# Altium PCB FIT_PM_Dual_Range_AFE.PcbDoc (part 12 of 17)
Units mm, origin at the board's own origin, x right, y up, seen from the top; angles counter-clockwise.
Board outline 259 x 114 mm, 8 copper layers (Top Layer, Mid-Layer 1, Mid-Layer 2, Layer 1, Layer 2, Mid-Layer 3, Mid-Layer 4, Bottom Layer), stack 1.616 mm thick; 963 components, 806 nets, 4757 pads, 2208 vias.
Unrouted connection lines stored in the file: 682.
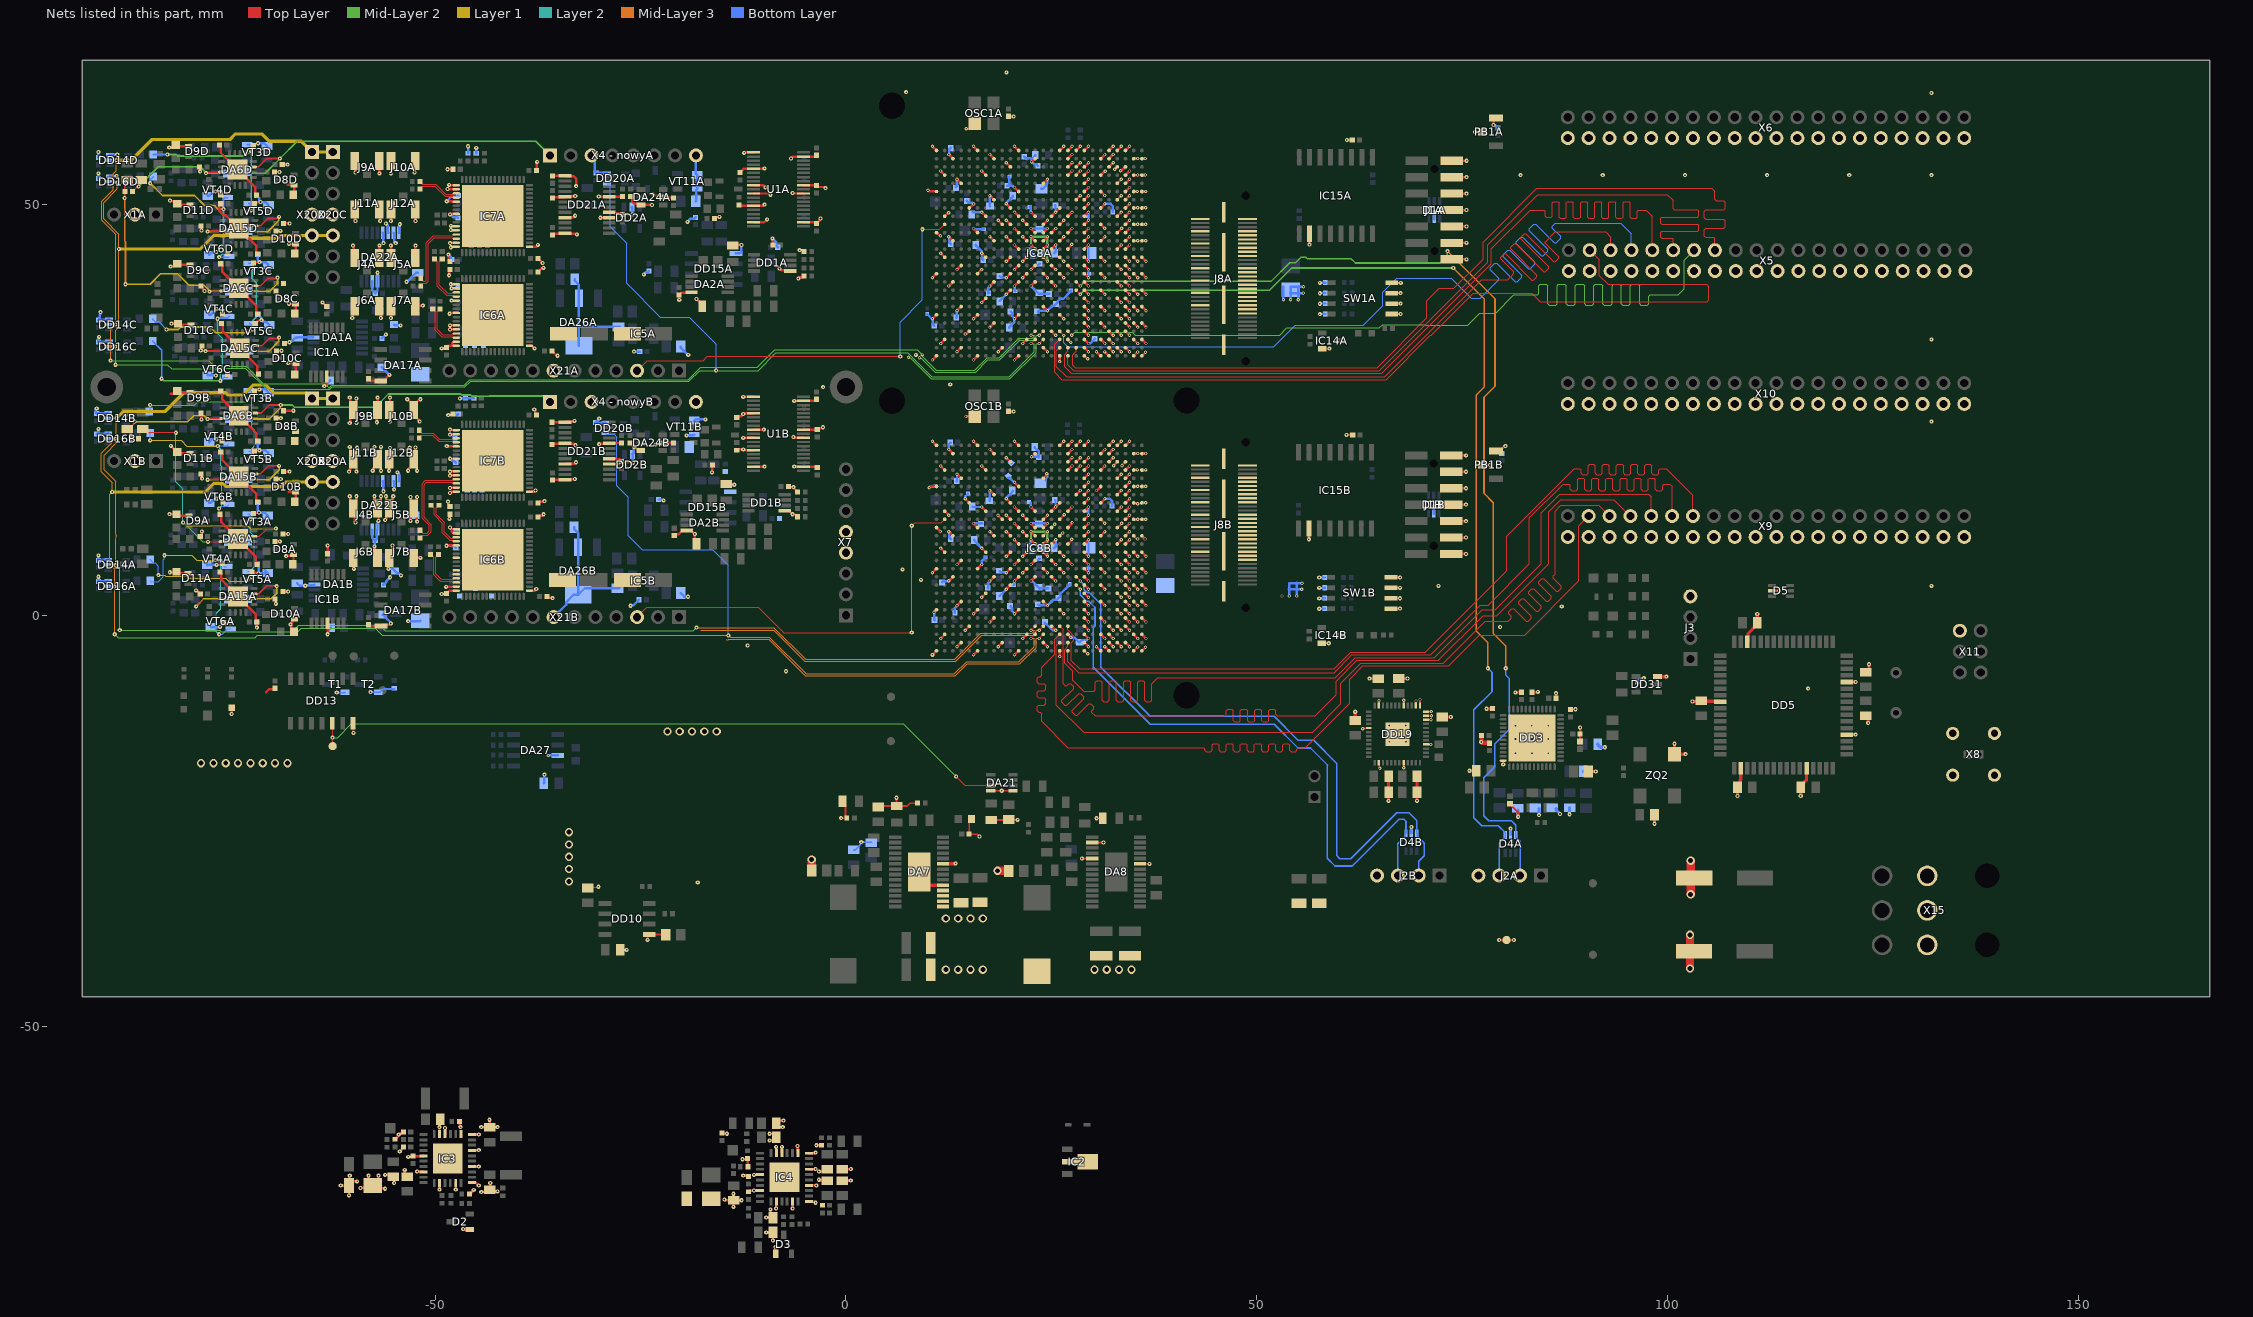
[diagram p14: the nets of this part, all layers, seen from the top]

## Via types
v1: diameter 0.5, hole 0.2, Top Layer to Bottom Layer, tented both sides, 1234 vias
v2: diameter 0.4, hole 0.2, Top Layer to Bottom Layer, tented both sides, 876 vias
v3: diameter 1, hole 0.6, Top Layer to Bottom Layer, tented both sides, 74 vias
v4: diameter 0.8, hole 0.4, Top Layer to Bottom Layer, tented both sides, 15 vias
v5: diameter 0.5, hole 0.2, Top Layer to Bottom Layer, 9 vias

## Nets (pads, with @x,y where several pads share a name; then routed paths per layer and width w, separated by ;. In a path a pad name is that pad's centre, name@x,y a point inside that pad or via, vN(x,y) a via of type N, cw(c..) or ccw(c..) an arc to the next point about the centre after c; other vN are vias at no path point) (continued)
GND: (continued)
  Bottom Layer w0.3: v1(-91.2,25.2) -91.3,25.1 -91.3,24.65 C125B.1@-91.2,24.55 -91.15,24.6 -89.85,24.6 DD14B.3@-89.8,24.65 ; v1(-91,4.7) C294A.1@-91,4.1 -90.95,4.15 -89.85,4.15 DD16A.3@-89.8,4.2 ; v1(-91,7.3) C125A.1@-91,6.7 -90.95,6.75 -89.85,6.75 DD14A.3@-89.8,6.8 ; v1(-91,22.7) -91.04,22.66 -91.04,22.21 C294B.1@-91.2,22.05 -91.15,22.1 -89.85,22.1 DD16B.3@-89.8,22.15 ; C125D.1@-91,53.15 v1(-91,53.8) ; C294D.1@-91,55.75 v1(-91,56.4) ; v1(-90.9,33.9) -91,33.8 C125C.1@-91,33.25 -90.95,33.3 -89.75,33.3 DD16C.3@-89.7,33.35 ; v1(-90.74,36.902) -90.779,36.863 -90.779,36.621 -90.84,36.56 -90.84,36.11 C294C.1@-91,35.95 -90.95,36 -89.75,36 DD14C.3@-89.7,36.05 ; DD16D.3@-89.6,53.45 -89.575,53.475 -88.795,53.475 v1(-88.77,53.5) ; DD14D.3@-89.6,56.05 -88.75,56.05 v1(-88.7,56.1) ; VT4A.1@-77.75,6.125 -77.725,6.15 v1(-76.602,6.15) ; VT6C.1@-77.7,29.2 v1(-76.7,29.2) ; VT4D.1@-77.668,51.046 -77.518,51.046 -77.021,51.543 -76.809,51.543 v1(-76.77,51.582) ; VT6B.1@-77.5,13.679 -77.35,13.679 -76.87,14.159 -76.639,14.159 v1(-76.601,14.197) ; VT4B.1@-77.5,21.079 -77.15,21.429 v1(-76.6,21.429) ; VT4C.1@-77.5,36.579 -77.35,36.579 -76.625,37.304 v1(-76.6,37.304) ; VT6D.1@-77.5,43.879 -77.15,44.229 v1(-76.6,44.229) ; VT6A.1@-77.3,-1.45 -77.284,-1.434 -76.234,-1.434 v1(-76.2,-1.4) ; C138D.1@-71.768,51.096 -71.4,50.729 -71.4,50.491 -71.26,50.351 v1(-71.26,50.308) ; C140A.1@-71.75,-0.8 -71.75,-1.45 v1(-71.7,-1.5) ; C138A.1@-71.65,6.225 -71.5,6.075 v1(-71.5,5.1) VT5A.1@-70.75,5.1 ; C140B.1@-71.6,13.729 -71.6,12.729 -71.45,12.579 v1(-71.45,12.525) -71.425,12.5 -70.75,12.5 VT3A.1@-70.4,12.15 ; C138B.1@-71.6,21.129 -71.6,20.354 -71.4,20.154 v1(-71.4,20.1) -70.65,20.1 VT5B.1@-70.3,19.75 ; C138C.1@-71.6,36.629 -71.19,36.219 -71.19,35.967 v1(-71.152,35.929) -71.098,35.929 -70.897,35.729 VT5C.1@-70.75,35.729 ; C140D.1@-71.6,43.929 -71.6,43.254 -71.4,43.054 v1(-71.4,43) -70.65,43 VT3C.1@-70.3,42.65 ; v1(-71.568,57.468) -70.818,57.468 VT3D.1@-70.468,57.118 ; v1(-71.4,27.5) -70.65,27.5 VT3B.1@-70.3,27.15 ; v1@-71.266,50.308 -71.257,50.3 -70.65,50.3 VT5D.1@-70.3,49.95 ; VT5A.1@-70.75,5.5 VT5A.1@-70.4,5.15 ; VT5C.1@-70.55,35.7 VT5C.1@-70.2,35.35 ; v1(-67.734,33.236) -67.695,33.275 -67.55,33.275 -67.025,33.8 R122xA.1@-66.8,33.8 -66.776,33.824 DA1A.11@-64.819,33.824 ; R122xB.1@-66.8,3.9 -66.5,3.6 v1(-65.817,3.6) ; v1@-65.817,3.613 -65.779,3.651 -65.65,3.651 -65.62,3.681 -64.788,3.681 DA1B.11@-64.713,3.756 ; v1(-63.5,27.9) -63.15,28.25 -63.125,28.25 -62.8,28.575 C319A.1@-62.8,28.6 ; v1(-63.1,-2.3) -63.1,-2.246 -63.025,-2.171 -63.025,-1.825 C320B.1@-62.7,-1.5 ; DA22B.6@-57.675,10.45 -57.657,10.432 -57.657,9.457 -57.382,9.182 -57.218,9.182 -57.14,9.26 -57.14,9.374 -57.09,9.424 -57.09,10.385 DA22B.5@-57.025,10.45 -57.025,11.375 v1(-56.9,11.5) ; DA22A.6@-57.675,40.65 -57.675,39.575 C90A.1@-57.3,39.2 -57.025,39.475 DA22A.5@-57.025,40.65 -57.025,41.675 v1(-57,41.7) ; v1(-57.4,8.4) -57.362,8.438 -57.362,9.038 C90B.1@-57.3,9.1 ; C320A.1@-56.5,30.2 -56.475,30.2 -56.15,29.875 -56.15,29.85 -55.576,29.276 v1(-55.572,29.276) ; C313A.1@-56.5,33.7 v1(-56,34.2) ; C319B.1@-56.4,0.1 -56.375,0.1 -56.05,-0.225 -56.05,-0.25 -55.4,-0.9 v1(-55.4,-1) ; DA22B.13@-56.375,16.35 -56.3,16.275 v1(-56.3,15.1) ; DA22A.13@-56.375,46.55 -56.3,46.475 v1(-56.3,45.3) ; C313B.1@-56.3,3.7 -55.948,4.052 -55.948,4.171 v1(-55.485,4.634) ; v1(-56,47.7) -55.8,47.5 -55.8,46.625 DA22A.14@-55.725,46.55 ; v1(-55.7,5.65) -55.15,5.65 R248B.1@-54.9,5.4 -54.6,5.1 -54.408,5.1 -54.17,4.862 v1(-54.166,4.862) ; DA22B.15@-55.075,16.35 -55,16.275 v1(-55,15.3) ; DA22A.15@-55.075,46.55 -55,46.475 -55,45.5 v1(-54.8,45.3) ; R248A.1@-55,35.4 -54.926,35.326 -54.226,35.326 v1(-54.2,35.3) ; v1(-54.6,17.4) -54.4,17.2 -54.4,16.375 DA22B.16@-54.425,16.35 ; DA22A.16@-54.425,46.55 -54.35,46.625 -54.35,47.55 v1(-54.3,47.6) ; v1(-53.5,40.6) -53.462,40.638 -53.387,40.638 -52.325,41.7 R46A.1@-52.1,41.7 ; v1(-53.3,-0.7) -51.85,-0.7 C103B.2@-51.8,-0.65 ; v1(-48.626,8.47) -48.59,8.506 -48.021,8.506 -47.925,8.41 -47.66,8.41 C3B.1@-47.5,8.25 ; v1(-48.6,50.4) -48.055,50.945 -47.336,50.945 C55A.1@-47.176,51.105 ; v1(-48.445,13.842) -48.445,13.788 -48.376,13.72 -48.376,13.425 C59B.1@-48.216,13.265 ; v1(-48.413,24.368) -48.375,24.407 -47.293,24.407 C58B.1@-47.2,24.5 ; v1(-48.4,43.9) -48.129,43.629 -48.129,43.456 C58A.1@-47.969,43.296 ; v1(-48.2,10.7) -47.766,10.266 -47.387,10.266 -47.247,10.126 R26B.1@-47.247,10.106 ; v1(-48.2,22) -48.162,21.962 -47.962,21.962 C55B.1@-47.6,21.6 ; v1(-48.19,48.8) -48.136,48.8 -47.863,48.527 -47.386,48.527 C50A.1@-47.226,48.367 ; v1(-48.175,19.056) -47.879,18.76 -47.66,18.76 C50B.1@-47.5,18.6 ; v1(-47.993,39.8) -47.955,39.838 -47.315,39.838 R26A.1@-47.247,39.906 ; v1(-47,26.4) -46.34,26.4 R30B.1@-46.3,26.44 R24B.1@-45.3,26.44 ; R30A.1@-46,56.24 v1(-46,57.1) ; R24A.1@-45,56.24 v1(-45,56.9) ; C255.1@-36.781,-20.414 -36.7,-20.333 v1(-36.7,-19.383) ; v2(-36.253,-17.049) DA27.7@-35.069,-17.049 ; X21B.7@-35.58,-0.22 -34.075,1.285 -34.075,1.575 -33.15,2.5 DA26B.4@-32.6,2.5 ; C144B.1@-33.1,10.7 -33.1,10.525 -32.6,10.025 DA26B.2@-32.6,8.3 DA26B.4@-32.6,2.5 ; C144A.1@-33,40.9 -33,40.725 -32.5,40.225 DA26A.2@-32.5,38.6 -32.5,35.02 ; DA26A.4@-32.5,32.8 -32.5,35.02 ; -30.96,55.98 -30.96,55.601 -30.56,55.201 -30.56,54.01 C94A.1@-30.4,53.85 DD20A.3@-29.1,53.85 ; v1(-30.028,23.95) -30.225,23.754 -30.225,23.725 C94B.1@-30.5,23.45 DD20B.3@-29.3,23.45 ; C67B.1@-27.8,3.3 -31.8,3.3 DA26B.4@-32.6,2.5 ; C67A.1@-27.7,35.1 -32.42,35.1 -32.5,35.02 ; C67B.1@-27.65,3.3 -27.225,3.725 -27.225,3.875 -26.9,4.2 IC5B.2@-26,4.2 ; C67A.1@-27.55,35.1 -27.125,34.675 -27.125,34.525 -26.9,34.3 IC5A.2@-26,34.3 ; v1(-26.215,1.168) -26.176,1.206 -25.894,1.206 C56B.1@-25.2,1.9 ; DD2A.2@-26.05,49.7 -26.025,49.675 -26.025,48.825 v1(-26,48.8) ; v1(-25.925,18.577) -25.963,18.614 -25.963,19.563 DD2B.2@-26,19.6 -25.856,19.744 -25.856,20.47 v1(-25.818,20.509) ; v1(-25.8,32.1) C56A.1@-25.1,32.1 ; v1(-24.6,41.5) -24.36,41.74 -24.16,41.74 C101A.1@-24,41.9 ; C101B.1@-22.8,14.1 -22.3,14.1 v1(-22.2,14) ; C62B.1@-20.1,2.7 -20.1,2.686 -19.675,2.261 v1(-19.228,2.261) ; C62A.1@-20.1,32.7 -20.1,32.55 -19.25,31.7 v1(-19.2,31.7) ; v1(-19.4,21.9) -18.55,21.9 VT11B.2@-18.45,22 ; v1(-19.3,47.9) -18.91,48.29 -18.46,48.29 C117A.1@-18.3,48.45 ; VT11B.1@-18.45,23.7 -18.293,23.857 v1(-17.115,23.857) ; C79A.1@-18.3,50.4 -18.25,50.45 -18.25,51.75 VT11A.2@-18.1,51.9 VT11A.1@-18.1,53.6 -18.26,53.76 -18.26,55.98 ; DD15A.5@-13.4,44.07 -12.925,44.07 -12.775,44.22 -12.775,44.97 -12.713,45.032 v1(-12.713,45.086) ; v1(-8.961,45.886) -8.46,45.385 -8.46,44.96 C113A.1@-8.3,44.8 ; C196A.1@9.904,36.671 9.904,36.646 10.445,36.105 10.5,36.105 v2(10.519,36.086) 10.519,36.059 10.581,35.997 10.581,35.401 C232A.1@10.756,35.226 ; v2(10.116,15.528) 10.143,15.528 10.332,15.717 C98B.1@10.903,15.717 ; v2(10.719,0.385) 10.738,0.366 10.738,-0.547 C165B.1@10.779,-0.589 ; C225B.1@11.699,4.007 11.867,4.174 12.5,4.174 v2(12.519,4.194) ; v2(12.519,10.186) 12.519,10.159 12.586,10.092 12.586,9.449 C166B.1@12.752,9.282 ; v2(12.519,20.186) 12.519,20.822 12.693,20.996 C231B.1@12.757,20.996 ; v2(12.519,46.086) 12.519,46.059 12.582,45.996 12.582,45.363 C225A.1@12.759,45.186 ; v2(12.519,56.086) 12.557,56.124 12.557,56.696 C231A.1@12.757,56.895 ; C232B.1@13.269,0.296 13.255,0.31 13.255,0.895 13.519,1.159 v2(13.519,1.186) ; C166A.1@13.419,36.246 13.5,36.327 13.5,37.067 v2(13.519,37.086) ; C228B.1@13.479,16.336 13.513,16.37 13.513,17.18 v2(13.519,17.186) ; v2(14.519,14.186) 14.538,14.205 14.538,14.494 14.85,14.806 C196B.1@14.85,14.831 ; C167A.1@14.7,50.442 14.905,50.237 15.35,50.237 15.511,50.077 v2(15.538,50.077) ; C222B.1@15.421,13.195 15.43,13.186 v2(16.519,13.186) ; C222A.1@15.421,49.095 15.43,49.086 v2(16.519,49.086) ; v2(15.519,47.086) 15.546,47.086 15.635,46.997 C98A.1@16.77,46.997 ; v2@15.526,11.193 16.578,11.193 C167B.1@16.585,11.186 ; C230B.1@15.607,9.187 15.607,9.112 16.519,8.2 v2(16.519,8.186) ; C230A.1@15.819,45.086 15.819,45.011 16.5,44.33 16.5,44.105 v2(16.519,44.086) 16.519,44.059 16.56,44.018 16.56,43.391 C165A.1@16.712,43.239 ; v2(16.519,6.186) 16.538,6.205 16.538,6.629 16.975,7.066 C193B.1@17,7.066 ; C229B.1@17.27,3.347 C229B.1@17.337,3.414 ; C229B.1@17.345,3.311 17.345,3.958 17.519,4.132 v2(17.519,4.186) ; C229A.1@17.412,39.278 C229A.1@17.345,39.211 17.345,39.858 17.519,40.032 v2(17.519,40.086) ; v2(17.519,15.186) 17.519,13.925 C164B.1@17.522,13.922 ; v2(17.519,51.086) 17.519,49.825 C164A.1@17.522,49.822 ; C157B.1@18.704,5.388 18.868,5.224 19.481,5.224 v2(19.519,5.186) ; C157A.1@18.704,41.288 18.868,41.124 19.481,41.124 v2(19.519,41.086) ; C197B.1@18.719,2.382 19.519,3.182 v2(19.519,3.186) v2@19.5,3.186 ; C197A.1@18.719,38.282 19.519,39.082 v2(19.519,39.086) v2@19.5,39.086 ; v2(19.519,14.186) 19.557,14.224 19.557,14.341 20.319,15.103 C227B.1@20.319,15.178 ; v2(19.519,19.186) C221B.1@20.194,18.511 ; v2(19.519,50.086) 19.557,50.124 19.557,50.241 20.319,51.003 C227A.1@20.319,51.078 ; C226A.1@19.601,52.27 19.926,52.27 ; C226B.1@19.769,16.732 19.918,16.732 20.446,16.205 20.5,16.205 v2(20.519,16.186) ; C193A.1@19.889,53.394 19.889,52.306 19.926,52.27 ; C208A.1@19.892,35.022 19.892,35.097 20.5,35.705 20.5,36.067 v2(20.519,36.086) 20.519,36.14 20.245,36.414 20.245,36.779 C216A.1@20.04,36.984 ; C216B.1@20.04,1.084 20.245,0.879 20.245,0.514 20.519,0.24 v2(20.519,0.186) v2@20.519,0.132 ; C160B.1@20.446,3.693 20.5,3.747 20.5,4.167 v2(20.519,4.186) ; v2(20.519,40.086) 20.557,40.048 20.557,39.484 C160A.1@20.603,39.439 ; v2(20.519,52.086) 20.465,52.086 20.281,52.27 19.926,52.27 ; C221A.1@21.68,55.831 21.855,55.656 22.455,55.656 22.589,55.522 ; C159A.1@22.369,49.71 22.394,49.71 C159A.1@22.469,49.785 ; C159B.1@22.481,13.737 22.481,13.251 22.519,13.213 v2(22.519,13.186) ; C159A.1@22.481,49.71 22.481,49.124 v2(22.519,49.086) ; v2(22.519,4.186) 22.557,4.148 22.682,4.148 C80B.1@23.554,3.276 ; v2(22.519,6.186) 23.034,6.701 23.368,6.701 C147B.1@23.573,6.906 ; v2(22.519,11.186) v2(24.519,11.186) ; v2(22.519,40.086) 23.466,39.139 C152A.1@24.726,39.139 ; v2(22.519,42.086) 23.034,42.601 23.368,42.601 C147A.1@23.573,42.806 ; v2(22.519,47.086) v2(24.519,47.086) ; v2(22.589,19.292) 22.616,19.292 22.639,19.316 C214B.1@23.47,19.316 ; C215B.1@22.984,20.481 22.984,20.406 23.234,20.156 23.294,20.156 23.47,19.98 C214B.1@23.47,19.316 ; C215A.1@23.037,56.023 23.037,55.948 22.787,55.698 22.764,55.698 22.589,55.522 ; C200A.1@23.371,54.709 23.196,54.884 22.925,54.884 22.636,55.173 22.608,55.173 v2(22.589,55.192) 22.589,55.522 ; C198A.1@23.388,36.846 23.388,37.004 23.433,37.05 24.456,37.05 24.492,37.086 v2(24.519,37.086) 25.107,37.673 25.346,37.673 25.551,37.878 C211A.1@25.551,37.883 25.756,38.088 25.756,38.237 26.049,38.529 26.44,38.529 27.319,39.408 27.319,39.457 C162A.1@27.394,39.532 ; C200B.1@23.404,1.315 23.508,1.211 24.494,1.211 v2(24.519,1.186) 25.209,1.876 25.654,1.876 25.859,2.081 C211B.1@25.859,2.086 26.064,2.291 26.064,2.568 27.25,3.754 C162B.1@27.25,3.779 ; C214B.1@23.47,19.266 C214B.1@23.47,19.316 ; C80B.1@23.516,3.276 C80B.1@23.554,3.276 ; C214B.1@23.539,19.316 C214B.1@23.47,19.316 ; C80B.1@23.591,3.239 C80B.1@23.554,3.276 ; C84A.1@23.796,51.91 23.946,51.91 24.371,52.335 24.371,52.485 24.481,52.595 24.481,53.048 v2(24.519,53.086) ; C198B.1@24.186,-0.891 24.186,-0.896 24.391,-1.101 24.444,-1.101 25.157,-1.814 v2(25.519,-1.814) ; C84B.1@24.296,16.472 24.296,16.622 24.481,16.807 24.481,17.197 24.453,17.224 v2(24.453,17.252) ; C152B.1@24.651,3.276 C80B.1@23.554,3.276 ; L8B.2@25.356,8.179 25.519,8.342 v2(25.519,9.186) ; L8A.2@25.356,44.079 25.519,44.242 v2(25.519,45.086) ; C85B.1@25.49,13.995 25.504,13.981 25.504,13.201 v2(25.519,13.186) ; C85A.1@25.49,49.895 25.504,49.881 25.504,49.101 v2(25.519,49.086) ; v2(25.519,34.086) v2@25.538,34.105 ; v2@27.358,-2.653 v2(27.358,-2.68) 27.377,-2.699 27.796,-2.699 28.369,-3.272 C208B.1@28.444,-3.272 28.694,-3.022 29.284,-3.022 29.492,-2.814 v2(29.519,-2.814) ; v2@29.499,2.186 v2(29.519,2.186) ; v2(29.519,-1.814) v2@29.519,-1.787 ; v2@29.519,-0.841 v2(29.519,-0.814) v2@29.538,-0.795 ; v2(29.519,0.186) v2@29.538,0.167 ; v2(29.519,5.186) v2(29.519,6.186) ; v2(29.519,7.186) v2(29.519,9.186) ; v2(29.519,12.186) v2(29.519,13.186) ; v2(29.519,33.086) 29.538,33.105 29.727,33.105 C214A.1@30.294,33.672 ; v2(29.519,35.086) v2@29.538,35.105 ; v2(29.519,36.086) v2@29.538,36.067 ; v2(29.519,41.086) v2(29.519,42.086) ; v2(29.519,43.086) v2(29.519,45.086) ; v2(29.519,48.086) v2(29.519,49.086) ; v2(31.519,14.186) 32.114,14.186 32.4,13.9 32.4,13.33 R105B.1@32.37,13.3 ; v2(31.519,50.086) 32.214,50.086 32.5,49.8 32.5,49.13 R105A.1@32.47,49.1 ; v2@53.244,38.454 C163A.2@53.244,40.022 ; 53.91,3.165 53.944,3.165 ; v2(53.944,2.354) 53.944,3.165 ; C163A.2@54.085,39.229 C163A.2@54.119,39.229 ; v2(54.119,38.417) C163A.2@54.119,39.229 ; v2@54.884,2.423 54.884,3.165 ; 54.884,3.991 54.884,3.922 ; v2@55.059,38.486 C163A.2@55.059,39.229 ; C163A.2@55.059,40.055 C163A.2@55.059,39.986 ; v2(55.478,3.165) 54.884,3.165 ; v2(55.513,3.922) 54.884,3.922 ; v2(55.653,39.229) C163A.2@55.059,39.229 ; v2(55.688,39.986) C163A.2@55.059,39.986 ; D4B.2@68.819,-26.514 68.826,-26.507 68.823,-26.504 68.823,-25.768 v1(68.826,-25.764) ; D1B.2@71.544,12.372 v1(71.544,13.222) ; D1A.2@71.619,48.236 v1(71.619,49.086) ; v1(78.819,59.686) 78.857,59.648 79.007,59.648 C104A.1@79.369,59.286 ; C104B.1@79.851,19.853 79.851,20.277 80.135,20.561 80.231,20.561 v1(80.269,20.6) ; D4A.2@80.891,-26.719 80.903,-26.706 80.897,-26.7 80.897,-25.975 v1(80.903,-25.969) ; C107.1@96.349,-8.099 96.509,-7.939 96.609,-7.939 96.865,-7.683 97.075,-7.683 v1(97.114,-7.644) ; 53.944,3.165 53.944,3.922 54.884,3.922 ; 53.944,3.165 54.884,3.165 ; C163A.2@54.119,39.229 C163A.2@54.119,39.636 54.119,39.986 C163A.2@55.059,39.986 ; C163A.2@54.119,39.229 C163A.2@55.059,39.229 ; 54.884,3.165 54.884,3.922 ; C163A.2@55.059,39.229 C163A.2@55.059,39.986
  Bottom Layer w0.4: C228A.1@13.382,52.139 13.518,52.275 13.518,53.085 v2(13.519,53.086) ; v1(81.812,-24.521) C32.1@81.812,-23.721 ; v1(84.363,-24.312) C31.1@84.363,-23.512 ; C43.1@86.447,-23.518 86.447,-23.695 86.911,-24.159 v1(86.911,-24.172) ; v1(88.079,-24.217) C35.1@88.079,-23.417 ; C34.1@89.764,-18.985 89.789,-19.01 v1(91.262,-19.01) ; C30.1@91.507,-15.682 91.507,-15.729 91.832,-16.054 v1(92.368,-16.054)
  other v1: -18.048,-32.509 66.127,-15.394 68.16,-15.394 67.119,-14.464 66.119,-13.414 68.119,-13.414 117.119,-8.914 -7.3,-6.8 -11.973,-3.672 79.619,-1.414 87.119,1.086 113.545,2.987 72.119,3.586 132.119,3.586 9.14,4.325 6.891,5.592 60.932,21.967 132.119,23.586 -2.781,27.771 12.69,28.109 8.5,31.7 132.119,33.586 82.119,53.586 92.119,53.586 102.119,53.586 112.119,53.586 122.119,53.586 132.119,53.586 132.119,63.586 7.319,63.686 19.519,66.086
  other v2: 53.069,2.354 54.884,2.354 14.6,24.198 53.244,38.417 55.059,38.417
  other v3: 12.154,-43.129 13.654,-43.129 15.154,-43.129 16.654,-43.129 30.244,-43.129 31.744,-43.129 33.244,-43.129 34.744,-43.129 12.154,-36.899 13.654,-36.899 15.154,-36.899 16.654,-36.899 -33.704,-32.391 -33.704,-30.891 -33.704,-29.391 -33.704,-27.891 -33.704,-26.391 -78.491,-17.991 -76.991,-17.991 -75.491,-17.991 -73.991,-17.991 -72.491,-17.991 -70.991,-17.991 -69.491,-17.991 -67.991,-17.991 -21.741,-14.141 -20.241,-14.141 -18.741,-14.141 -17.241,-14.141 -15.741,-14.141
  other v5: 81.498,-16.789 83.498,-16.789 85.498,-16.789 81.499,-15.043 83.499,-15.043 85.499,-15.043 81.488,-13.426 83.488,-13.426 85.488,-13.426
GND_ADCA: C233A.1 C234A.1 IC8A.N13 IC8A.P13 IC8A.P14 IC8A.R13 IC8A.R14 L8A.1 | length 13.1
  Top Layer w0.3: v2(22.519,45.086) IC8A.P14@23.019,44.586 ; v2(22.519,46.086) IC8A.R14@23.019,45.586 ; IC8A.N13@24.019,43.586 v2(24.519,43.086) ; IC8A.P13@24.019,44.586 v2(24.519,45.086) ; IC8A.R13@24.019,45.586 v2(24.519,46.086)
  Mid-Layer 2 w0.3: v2(22.519,45.086) v2(22.519,46.086) v2(24.519,46.086) v2(24.519,45.086) v2(24.519,43.086)
  Bottom Layer w0.3: C234A.1@22.599,43.665 22.533,43.731 22.533,44.36 22.467,44.426 23.431,44.426 23.756,44.101 L8A.1@23.756,44.079 23.756,44.054 24.5,43.31 24.5,43.105 v2(24.519,43.086)
GND_ADCB: C233B.1 C234B.1 IC8B.N13 IC8B.P13 IC8B.P14 IC8B.R13 IC8B.R14 L8B.1 | length 12.5
  Top Layer w0.3: v2(22.519,9.186) IC8B.P14@23.019,8.686 ; v2(22.519,10.186) IC8B.R14@23.019,9.686 ; IC8B.N13@24.019,7.686 v2(24.519,7.186) ; IC8B.P13@24.019,8.686 v2(24.519,9.186) ; IC8B.R13@24.019,9.686 v2(24.519,10.186)
  Mid-Layer 2 w0.3: v2(22.519,9.186) v2(22.519,10.186) v2(24.519,10.186) v2(24.519,9.186) v2(24.519,7.186)
  Bottom Layer w0.3: v2(22.519,9.186) 22.5,9.167 22.5,8.67 C233B.1@22.392,8.562 ; C234B.1@22.524,7.802 22.458,7.867 22.458,8.497 C233B.1@22.392,8.562 ; L8B.1@23.681,8.216 23.681,8.237 23.356,8.562 C233B.1@22.392,8.562
In_COMP_STB1: IC8A.U25 X21A.3 | length 52.3
  Top Layer w0.145: X21A.3@-25.42,29.78 -24.2,31 -17.4,31 -16.885,31.515 v1(6.603,31.515) ; v1(9.3,47) 11.433,47 IC8A.U25@12.019,47.586
  Bottom Layer w0.145: v1(6.603,31.515) 6.603,35.703 9.3,38.4 v1(9.3,47)
In_COMP_STB2: IC8B.U25 X21B.3 | length 52.5
  Top Layer w0.145: X21B.3@-25.42,-0.22 -24.235,0.965 -10.659,0.965 -7.593,-2.1 v1(8,-2.1) ; v1(8,10.9) 8.388,11.288 11.622,11.288 IC8B.U25@12.019,11.686
  Bottom Layer w0.145: v1(8,-2.1) v1(8,10.9)
IN_PWR_OK: B19.1 DA21.3 DD13.5 | length 86.8
  Top Layer w0.15: DD13.5@-62.527,-13.124 -62.497,-13.155 v1(-62.497,-14.883) -62.489,-14.891 -62.489,-15.906 B19.1@-62.481,-15.914 ; v1(13.403,-19.624) 14.463,-20.685 17.721,-20.685 DA21.3@17.741,-20.706
  Mid-Layer 2 w0.15: v1(-62.497,-14.883) -61.888,-14.883 -60.224,-13.219 6.998,-13.219 v1(13.403,-19.624)
INAAA_N: IC6A.20 R7A.2 | length 6.3
  Top Layer w0.145: R7A.2@-50.1,43.36 -49.883,43.143 -49.829,43.143 -49.744,43.058 -49.744,40.076 -48.601,38.933 -48.095,38.933 -47.89,38.933 -47.762,38.806 IC6A.20@-47.427,38.806
INAAA_P: IC6A.19 R6A.2 | length 5.9
  Top Layer w0.145: R6A.2@-49.143,43.36 -49.361,43.143 -49.414,43.143 -49.499,43.058 -49.499,40.177 -48.5,39.178 -48.196,39.178 -47.89,39.178 -47.762,39.306 IC6A.19@-47.427,39.306
INAAB_N: IC6B.20 R7B.2 | length 6.1
  Top Layer w0.145: R7B.2@-50.5,13.4 -50.283,13.183 -50.229,13.183 -50.144,13.098 -50.144,12.226 -49.129,11.211 -49.129,10.044 -48.219,9.133 -47.89,9.133 -47.762,9.006 IC6B.20@-47.427,9.006
INAAB_P: IC6B.19 R6B.2 | length 5.7
  Top Layer w0.145: R6B.2@-49.543,13.4 -49.761,13.183 -49.814,13.183 -49.899,13.098 -49.899,12.327 -48.884,11.312 -48.884,10.145 -48.117,9.378 -47.89,9.378 -47.762,9.506 IC6B.19@-47.427,9.506
INABA_N: IC6A.30 R5A.2 | length 5.7
  Top Layer w0.145: R5A.2@-50.3,37.3 -50.083,37.083 -50.057,37.083 -49.973,36.998 -49.973,34.726 -49.18,33.933 -48.095,33.933 -47.89,33.933 -47.762,33.806 IC6A.30@-47.427,33.806
INABA_P: IC6A.29 R4A.2 | length 5.2
  Top Layer w0.145: R4A.2@-49.4,37.3 -49.617,37.083 -49.643,37.083 -49.728,36.998 -49.728,34.828 -49.078,34.178 -48.196,34.178 -47.89,34.178 -47.762,34.306 IC6A.29@-47.427,34.306
INABB_N: IC6B.30 R5B.2 | length 5.8
  Top Layer w0.145: R5B.2@-50.562,7.404 -50.344,7.186 -50.289,7.186 -50.204,7.101 -50.204,6.715 ; -50.203,6.714 -50.203,4.957 -49.38,4.133 -47.89,4.133 -47.762,4.006 IC6B.30@-47.427,4.006
INABB_P: IC6B.29 R4B.2 | length 5.4
  Top Layer w0.145: -49.959,6.816 -49.959,7.098 -49.874,7.183 -49.817,7.183 R4B.2@-49.6,7.4 ; -49.958,6.815 -49.958,5.058 -49.278,4.378 -47.89,4.378 -47.762,4.506 IC6B.29@-47.427,4.506
INBAA_N: IC7A.20 R128A.2 | length 5.2
  Top Layer w0.145: R128A.2@-51.86,51.872 -51.643,52.089 -51.643,52.128 -51.558,52.213 -50.032,52.213 -48.801,50.983 -48.095,50.983 -47.89,50.983 -47.762,50.856 IC7A.20@-47.427,50.856
INBAA_P: IC7A.19 R126A.2 | length 5.2
  Top Layer w0.145: R126A.2@-51.86,52.8 -51.643,52.583 -51.643,52.543 -51.558,52.458 -49.93,52.458 -48.7,51.228 -48.196,51.228 -47.89,51.228 -47.762,51.356 IC7A.19@-47.427,51.356
INBAB_N: IC7B.20 R128B.2 | length 5.1
  Top Layer w0.145: R128B.2@-51.949,21.603 -51.731,21.82 -51.731,21.86 -51.646,21.944 -50.348,21.944 -49.587,21.183 -48.285,21.183 -47.89,21.183 -47.762,21.056 IC7B.20@-47.427,21.056
INBAB_P: IC7B.19 R126B.2 | length 5.1
  Top Layer w0.145: R126B.2@-51.949,22.531 -51.731,22.314 -51.731,22.274 -51.646,22.189 -50.246,22.189 -49.485,21.428 -48.386,21.428 -47.89,21.428 -47.762,21.556 IC7B.19@-47.427,21.556
INBBA_N: IC7A.30 R124A.2 | length 9.6
  Top Layer w0.145: R124A.2@-51.755,40.063 -51.537,40.281 -51.537,40.325 -51.452,40.41 -51.061,40.41 -50.833,40.639 -50.833,45.259 -50.109,45.983 -48.535,45.983 -47.89,45.983 -47.762,45.856 IC7A.30@-47.427,45.856
INBBA_P: IC7A.29 R122A.2 | length 9.6
  Top Layer w0.145: R122A.2@-51.76,41 -51.543,40.783 -51.543,40.74 -51.458,40.655 -51.163,40.655 -51.078,40.74 -51.078,45.361 -50.21,46.228 -48.636,46.228 -47.89,46.228 -47.762,46.356 IC7A.29@-47.427,46.356
INBBB_N: IC7B.30 R124B.2 | length 11.9
  Top Layer w0.145: R124B.2@-51.838,9.423 -51.621,9.641 -51.621,9.685 -51.536,9.77 -50.883,9.77 -50.455,10.199 -50.455,11.055 -51.343,11.943 -51.343,15.926 -51.085,16.183 -47.89,16.183 -47.762,16.056 IC7B.30@-47.427,16.056
INBBB_P: IC7B.29 R122B.2 | length 11.9
  Top Layer w0.145: R122B.2@-51.844,10.36 -51.626,10.142 -51.626,10.1 -51.541,10.015 -50.985,10.015 -50.7,10.3 -50.7,10.954 -51.588,11.841 -51.588,16.027 -51.186,16.428 -47.89,16.428 -47.762,16.556 IC7B.29@-47.427,16.556
Int_PDnA: DA6A.7 DA6A.15 R11A.1 R109.2 | length 37.3
  Top Layer w0.15: R109.2@-86.13,21.5 -85.915,21.715 -85.915,22.385 R11A.1@-85.6,22.7 -85.2,22.3 -81.733,22.3 -81.655,22.223 v1(-81.561,22.223) ; v1(-77.662,8.94) -77.627,8.975 DA6A.7@-75.95,8.975 ; DA6A.15@-72.05,9.625 -71.388,9.625 -71.388,9.642 -70.53,10.5 -69.46,10.5 v1(-69.4,10.56)
  Mid-Layer 2 w0.15: v1(-80.675,11.305) -78.31,8.94 v1(-77.662,8.94)
  Layer 1 w0.15: v1(-80.675,11.305) -80.27,10.9 -72.8,10.9 -72.46,10.56 v1(-69.4,10.56)
  Layer 2 w0.15: v1(-81.561,22.223) -81.561,16.254 -80.7,15.393 -80.7,11.33 v1(-80.675,11.305)
Int_PDnB: "X4 - nowyB.1" DA6B.7 DA6B.15 R11B.1 R109.1 | length 61.3
  Top Layer w0.2: R11B.1@-87.5,22.7 -87.275,22.7 -86.657,23.318 -86.657,23.543 v1(-86.6,23.6) ; v1(-77.7,23.9) -77.65,23.9 -77.575,23.975 DA6B.7@-75.85,23.975 ; DA6B.15@-71.95,24.625 -71.175,24.625 -70.2,25.6 v1(-68.8,25.6)
  Top Layer w0.3: R11B.1@-87.395,22.7 -87.07,22.375 R109.1@-87.07,21.5
  Mid-Layer 2 w0.2: v1(-68.8,25.6) -67.407,25.6 -67.157,25.35 -57.286,25.35 -55.686,26.95 -46.914,26.95 -46.782,26.818 -45.655,26.818 -45.486,26.65 -43.482,26.65 -43.432,26.7 -36.76,26.7 -36.04,25.98
  Layer 1 w0.2: v1(-86.6,23.6) -86.55,23.55 -80.15,23.55 -79.396,24.304 -78.104,24.304 v1(-77.7,23.9) -70.2,23.9 -68.857,25.243 -68.857,25.543 v1(-68.8,25.6)
Int_PDnC: DA6C.7 DA6C.15 R11C.1 R103.2 | length 38.8
  Top Layer w0.2: v1(-87.8,50.8) -87.8,51.57 R103.2@-87.77,51.6 -87.77,52.73 R11C.1@-87.5,53 ; v1(-77.493,39.4) -77.447,39.446 -75.879,39.446 DA6C.7@-75.85,39.475 ; DA6C.15@-71.95,40.125 -71.275,40.125 -70.4,41 -69.3,41 v1(-69.2,41.1)
  Mid-Layer 3 w0.2: v1(-87.8,50.8) -87.8,45.571 -87.7,45.471 v1(-87.7,40.3)
  Layer 1 w0.2: v1(-87.7,40.3) -84.7,40.3 -83.4,41.6 -81.4,41.6 -80,40.2 -78.162,40.2 -77.636,39.674 -77.636,39.625 -77.493,39.481 v1(-77.493,39.4) -77.443,39.45 -70.15,39.45 -69.2,40.4 v1(-69.2,41.1)
Int_PDnD: "X4 - nowyA.1" DA6D.7 DA6D.15 R11D.1 R103.1 | length 61.2
  Top Layer w0.2: R103.1@-86.83,51.6 -86.83,51.62 -86.307,52.143 -86.157,52.143 v1(-86.1,52.2) -86.1,52.7 R11D.1@-85.8,53 ; v1(-77.904,53.827) -77.823,53.827 -77.736,53.914 -76.047,53.914 DA6D.7@-76.018,53.943 ; DA6D.15@-72.118,54.593 -71.507,54.593 -70.5,55.6 v1(-68.9,55.6)
  Mid-Layer 2 w0.2: v1(-86.1,52.2) -83.7,54.6 -78.574,54.6 -78.168,54.194 -78.168,54.172 -77.904,53.908 v1(-77.904,53.827) -70.673,53.827 v1(-68.9,55.6) -66.8,57.7 -37.76,57.7 -36.04,55.98
INTA_G_DRV_N1: IC8A.D13 | length 18
  Top Layer w0.145: v2(23.519,34.086) IC8A.D13@24.019,34.586
  Mid-Layer 2 w0.1: v2(8.946,31.346) 9.002,31.291 9.186,31.291 10.881,29.596 15.779,29.596 17.279,31.096 18.742,31.096 21.142,33.496 22.79,33.496 23.139,33.845 23.139,34.027 23.198,34.086 v2(23.519,34.086)
INTA_G_DRV_N2: IC8B.D13 | length 45.2
  Top Layer w0.145: v2(23.519,-1.814) IC8B.D13@24.019,-1.314
  Mid-Layer 3 w0.1: -17.7,-1.8 -8.809,-1.8 -5.016,-5.592 13.341,-5.592 16.529,-2.404 22.79,-2.404 23.139,-2.055 23.139,-1.873 23.198,-1.814 v2(23.519,-1.814)
INTA_G_DRV_P1: DD14C.2 DD14D.2 IC8A.D14 X20C.1 X20D.1 | length 176.5
  Top Layer w0.145: v2(22.519,34.086) IC8A.D14@23.019,34.586
  Mid-Layer 2 w0.1: v1(-89.5,31) -77.566,31 -76.566,30 -76.234,30 -75.934,30.3 -73,30.3 -70.9,28.2 -63.766,28.2 -63.666,28.3 -63.334,28.3 -63.1,28.066 -63.1,27.806 -62.994,27.7 -62.911,27.7 -62.611,28 -46.483,28 -45.783,28.7 -19.2,28.7 -17.7,30.2 -10.8,30.2 -8.691,32.309 8.691,32.309 9.356,31.644 9.356,31.461 10.98,29.836 15.68,29.836 17.18,31.336 18.643,31.336 21.043,33.736 22.691,33.736 22.899,33.944 22.899,34.027 22.841,34.086 v2(22.519,34.086)
  Mid-Layer 3 w0.1: v1(-89.5,31) -89.5,34.8 v1(-88.9,35.4) -88.9,46.4 -90.598,48.098 -90.598,50.402 -89.17,51.83 -89.17,53.772 -88.8,54.142 v1(-88.8,55.4)
  Layer 1 w0.381: v1(-88.8,55.4) -87,55.4 -84.5,57.9 -75,57.9 -74.3,58.6 -71.1,58.6 -70.2,57.7 -66.3,57.7 X20D.1@-65,56.4 X20C.1@-62.46,56.4
  Bottom Layer w0.145: DD14C.2@-89.7,35.4 v1(-88.9,35.4) ; DD14D.2@-89.6,55.4 v1(-88.8,55.4)
  other v2: 9.3,31.7
INTA_G_DRV_P2: DD14A.2 DD14B.2 IC8B.D14 X20A.1 X20B.1 | length 174.8
  Top Layer w0.145: v2(22.519,-1.814) IC8B.D14@23.019,-1.314
  Mid-Layer 2 w0.1: v1(-88.4,-1.8) -76.234,-1.8 -76.034,-2 -67.4,-2 -66.6,-1.2 -56.8,-1.2 -56.1,-1.9 -18.6,-1.9 v1(-18.2,-1.5)
  Mid-Layer 3 w0.1: v1(-88.8,24) -88.8,22.036 -88.5,21.736 -88.5,21.302 -90.285,19.517 -90.285,17.71 -88.9,16.325 -88.9,9.865 -88.8,9.765 -88.8,9.433 -88.9,9.333 v1(-88.9,6.1) -88.4,5.6 v1(-88.4,-1.8) ; v1(-18.2,-1.5) -8.769,-1.5 -4.917,-5.352 13.242,-5.352 16.43,-2.164 22.691,-2.164 22.899,-1.956 22.899,-1.873 22.841,-1.814 v2(22.519,-1.814)
  Layer 1 w0.381: v1(-88.8,24) -88,24.8 -82.9,24.8 -80.6,27.1 -75.5,27.1 -75.2,26.8 -73.4,26.8 -72.159,28.041 -70.641,28.041 -69.659,27.06 -65.66,27.06 X20B.1@-65,26.4 X20A.1@-62.46,26.4
  Bottom Layer w0.145: DD14A.2@-89.8,6.15 -89.75,6.1 v1(-88.9,6.1) ; DD14B.2@-89.8,24 v1(-88.8,24)
INTA_GA: R17A.2 VT3A.4 VT5A.4 | length 23.7
  Layer 1 w0.15: v1(-83.7,4.9) -82.927,4.9 -82.802,4.775 -80.711,4.775 -80.686,4.8 -80.334,4.8 -80.072,4.538 -75.469,4.538 -75.105,4.174 -72.766,4.174 v1(-72.3,4.64)
  Layer 2 w0.15: v1(-72.5,11.7) -72.5,10.1 -72,9.6 -72,5.9 -72.3,5.6 v1(-72.3,4.64)
  Bottom Layer w0.15: R17A.2@-84.7,6.8 -84.7,6.75 -84.325,6.375 -84.075,6.375 -83.7,6 v1(-83.7,4.9) ; VT5A.4@-72.8,5.35 -72.525,5.35 -72.3,5.125 v1(-72.3,4.64) ; VT3A.4@-72.8,12.35 -72.725,12.35 -72.5,12.125 v1(-72.5,11.7)
INTA_GB: R17B.2 VT3B.4 VT5B.4 | length 23.4
  Mid-Layer 2 w0.15: v1(-84.7,25.6) -79.3,25.6 -78.9,26 -72.94,26 v1(-72.3,26.64)
  Layer 2 w0.15: v1(-72.3,19.2) -72.3,20.3 -72,20.6 -72,22.6 -72.3,22.9 v1(-72.3,26.64)
  Bottom Layer w0.15: R17B.2@-84.8,24.8 -84.7,24.9 v1(-84.7,25.6) ; VT5B.4@-72.7,19.95 -72.525,19.95 -72.3,19.725 v1(-72.3,19.2) ; VT3B.4@-72.7,27.35 -72.525,27.35 -72.3,27.125 v1(-72.3,26.64)
INTA_GC: R17C.2 VT3C.4 VT5C.4 | length 23.2
  Layer 1 w0.2: v1(-82.7,34.8) -81.259,34.8 -80.959,35.1 -77.409,35.1 -76.709,34.4 -72.6,34.4 v1(-72.2,34.8)
  Layer 2 w0.2: v1(-72.2,34.8) -72.2,35.9 -71.8,36.3 -71.8,40.5 -72.3,41 -72.3,41.919 -72.1,42.119 v1(-72.1,42.2)
  Bottom Layer w0.2: R17C.2@-84.4,36.1 -84.4,36.05 -84.05,35.7 -83.6,35.7 v1(-82.7,34.8) ; VT3C.4@-72.7,42.85 -72.35,42.85 -72.15,42.65 -72.15,42.25 v1(-72.1,42.2) ; VT5C.4@-72.6,35.55 -72.4,35.35 -72.4,35 v1(-72.2,34.8)
INTA_GD: R17D.2 VT3D.4 VT5D.4 | length 21.6
  Mid-Layer 2 w0.2: v1(-82.6,56.1) -81.541,56.1 -81.359,55.918 -73.022,55.918 v1(-72.4,56.54)
  Layer 2 w0.2: v1(-72.4,49.3) v1(-72.4,56.54)
  Bottom Layer w0.2: R17D.2@-84.3,56.1 v1(-82.6,56.1) ; VT3D.4@-72.868,57.318 -72.6,57.318 -72.4,57.118 v1(-72.4,56.54) ; VT5D.4@-72.7,50.15 -72.5,49.95 -72.5,49.4 v1(-72.4,49.3)
INTB_G_DRV_N1: IC8A.C13 | length 20.1
  Top Layer w0.145: v2(23.519,33.086) IC8A.C13@24.019,33.586
  Mid-Layer 2 w0.1: v2(7.6,31.4) 7.657,31.343 7.809,31.343 10.354,28.797 19.95,28.797 23.139,31.986 23.139,33.027 23.198,33.086 v2(23.519,33.086)
INTB_G_DRV_N2: IC8B.C13 | length 43.2
  Top Layer w0.145: v2(23.519,-2.814) IC8B.C13@24.019,-2.314
  Mid-Layer 3 w0.1: -14.567,-3 -14.352,-3 -14.258,-2.907 -9.425,-2.907 -4.956,-7.375 13.308,-7.375 14.779,-5.904 21.149,-5.904 23.139,-3.914 23.139,-2.873 23.198,-2.814 v2(23.519,-2.814)
INTB_G_DRV_P1: DD16C.2 DD16D.2 DD20A.1 IC8A.C14 X20C.5 X20D.5 | length 202.7
  Top Layer w0.145: v2(22.519,33.086) IC8A.C14@23.019,33.586
  Mid-Layer 2 w0.1: v1(-88.9,30.5) -82.591,30.5 -82.091,30 -76.849,30 -76.649,29.8 -76.151,29.8 -75.851,30.1 -73.1,30.1 -70.5,27.5 -62.828,27.5 -62.528,27.8 -46.4,27.8 -45.7,28.5 -19.117,28.5 -19.017,28.6 -19,28.6 -17.8,29.8 v1(-15.8,29.8) -10.7,29.8 -8.525,31.975 7.525,31.975 10.463,29.037 19.85,29.037 22.899,32.086 22.899,33.027 22.841,33.086 v2(22.519,33.086)
  Mid-Layer 3 w0.1: v1(-88.9,30.5) v1(-88.9,32.7) -88.9,34.7 -88.5,35.1 v1(-88.5,44.6) -88.5,46.4 -90.352,48.252 -90.352,50.248 -88.7,51.9 v1(-88.7,52.7)
  Layer 1 w0.381: v1(-88.5,44.6) -78.6,44.6 -76.96,46.24 -73.182,46.24 -72.842,45.9 -69.2,45.9 -68.86,46.24 X20D.5@-65,46.24 X20C.5@-62.46,46.24
  Bottom Layer w0.145: DD16C.2@-89.7,32.7 v1(-88.9,32.7) ; DD16D.2@-89.6,52.8 -89.5,52.7 v1(-88.7,52.7) ; DD20A.1@-29.1,52.55 -28.825,52.55 -28.698,52.423 -28.698,47.298 -26.7,45.3 -26.7,40.4 -22.6,36.3 -19.1,36.3 -15.8,33 v1(-15.8,29.8)
INTB_G_DRV_P2: DD16A.2 DD16B.2 DD20B.1 IC8B.C14 X20A.5 X20B.5 | length 209.5
  Top Layer w0.145: v2(22.519,-2.814) IC8B.C14@23.019,-2.314
  Mid-Layer 2 w0.1: v1(-89,-2.3) -88.6,-2.7 -71.933,-2.7 -71.633,-2.4 -67.1,-2.4 -66.3,-1.6 -57.3,-1.6 -56.455,-2.445 v1(-14.317,-2.445)
  Mid-Layer 3 w0.1: v1(-89,-2.3) v1(-89,3.5) -89,5.634 -89.6,6.234 -89.6,14.749 v1(-89.331,15.017) -89.319,15.017 -89.319,16.152 -90.64,17.474 -90.64,19.76 v1(-88.9,21.5) ; v1(-14.317,-2.445) -14.266,-2.445 -14.044,-2.667 -9.326,-2.667 -4.857,-7.135 13.208,-7.135 14.68,-5.664 21.05,-5.664 22.899,-3.815 22.899,-2.873 22.841,-2.814 v2(22.519,-2.814)
  Layer 1 w0.381: v1(-89.331,15.017) -77.983,15.017 -76.959,16.041 -75.832,16.041 -75.492,15.7 -68.7,15.7 -68.16,16.24 X20B.5@-65,16.24 X20A.5@-62.46,16.24
  Bottom Layer w0.145: DD16A.2@-89.8,3.55 -89.75,3.5 v1(-89,3.5) ; DD16B.2@-89.8,21.5 v1(-88.9,21.5) ; DD20B.1@-29.3,22.15 -29.173,22.023 -28.223,22.023 -27.9,21.7 -27.9,15.8 -26.5,14.4 -26.5,9.7 -24.8,8 -16.2,8 -14.3,6.1 -14.3,-2.427 v1(-14.317,-2.445)
INTB_GA: R35A.2 VT4A.4 VT6A.4 | length 24.2
  Layer 1 w0.15: v1(-82.971,7.319) -79.648,7.319 -79.034,6.705 -76.788,6.705 v1(-76.765,6.728)
  Layer 2 w0.15: v1(-76.765,6.728) -76.671,6.728 -76.518,6.575 -76.426,6.575 -76.177,6.326 -76.177,6.275 -76.1,6.199 -76.1,0.8 -76.625,0.275 -76.625,-1.975 v1(-76.3,-2.3)
  Bottom Layer w0.15: R35A.2@-84.7,4.2 -84.6,4.1 -83.7,4.1 -83.088,4.712 -83.088,6.769 -82.971,6.887 v1(-82.971,7.319) ; v1(-76.765,6.728) -76.698,6.661 -76.436,6.661 -75.7,5.925 VT4A.4@-75.35,5.925 ; v1(-76.3,-2.3) -75.9,-2.3 -75.25,-1.65 VT6A.4@-74.9,-1.65
INTB_GB: R35B.2 VT4B.4 VT6B.4 | length 20.3
  Layer 1 w0.15: v1(-84.7,21.3) -80.93,21.3 -80.238,20.608 v1(-76.468,20.608)
  Layer 2 w0.15: v1(-76.468,20.608) -76.1,20.241 -76.1,18.2 -75.964,18.064 -75.964,13.336 v1(-76.3,12.999)
  Bottom Layer w0.15: v1(-84.7,21.3) R35B.2@-84.7,22.2 ; v1(-76.468,20.608) -76.422,20.654 -75.325,20.654 VT4B.4@-75.1,20.879 ; v1(-76.3,12.999) -76.242,12.999 -75.988,13.254 -75.325,13.254 VT6B.4@-75.1,13.479
INTB_GC: R35C.2 VT4C.4 VT6C.4 | length 23
  Mid-Layer 2 w0.2: v1(-83.3,28.8) -83.05,28.55 v1(-76.15,28.55)
  Layer 2 w0.2: v1(-76.5,36.104) -76.5,34.3 -75.9,33.7 -75.9,30.264 -76.15,30.014 v1(-76.15,28.55)
  Bottom Layer w0.2: R35C.2@-84.2,33.2 R35C.2@-84.4,33.4 -84.4,33.35 -83.3,32.25 v1(-83.3,28.8) ; v1(-76.5,36.104) -76.496,36.104 -76.4,36.2 -75.279,36.2 VT4C.4@-75.1,36.379 ; v1(-76.15,28.55) -76.1,28.55 -75.65,29 VT6C.4@-75.3,29
INTB_GD: R35D.2 VT4D.4 VT6D.4 | length 20.3
  Layer 1 w0.2: v1(-84.7,52.6) -83.2,51.1 -79.3,51.1 -78.1,49.9 -76.908,49.9 -76.448,49.44 v1(-75.775,49.44)
  Layer 2 w0.2: v1(-76.3,43.6) -75.775,44.125 v1(-75.775,49.44)
  Bottom Layer w0.2: v1(-84.7,52.6) -84.65,52.65 -84.65,53.05 R35D.2@-84.3,53.4 ; v1(-76.3,43.6) -75.179,43.6 VT6D.4@-75.1,43.679 ; v1(-75.775,49.44) -75.775,50.646 -75.575,50.846 VT4D.4@-75.268,50.846
Integrator_PDnA: DA15A.7 DA15A.15 | length 18
  Top Layer w0.15: v1(-79.1,1.1) -78.225,1.975 DA15A.7@-75.95,1.975
  Top Layer w0.2: DA15A.15@-72.05,2.625 -71.475,2.625 -70.5,3.6 -69.4,3.6 -69.36,3.56 v1(-69.3,3.56)
  Layer 1 w0.2: v1(-79.1,1.1) -78.2,2 -70,2 -69.3,2.7 v1(-69.3,3.56)
Integrator_PDnB: DA15B.7 DA15B.15 | length 14.9
  Top Layer w0.2: v1(-77.7,16.5) -77.6,16.5 -77.525,16.575 DA15B.7@-75.85,16.575 ; DA15B.15@-71.95,17.225 -71.275,17.225 -70.3,18.2 v1(-69,18.2)
  Layer 1 w0.2: v1(-77.7,16.5) -70.209,16.5 -69,17.709 v1(-69,18.2)
Integrator_PDnC: DA15C.7 DA15C.15 | length 15.3
  Top Layer w0.2: v1(-77.941,32.166) -77.834,32.166 -77.825,32.175 DA15C.7@-75.75,32.175 ; DA15C.15@-71.85,32.825 -71.075,32.825 -70.2,33.7 -69.1,33.7 v1(-69,33.8)
  Layer 1 w0.2: v1(-77.941,32.166) -70.214,32.166 -69.03,33.35 -69.03,33.77 v1(-69,33.8)
Integrator_PDnD: DA15D.7 DA15D.15 | length 15
  Top Layer w0.2: v1(-77.7,46.7) -77.625,46.775 DA15D.7@-75.85,46.775 ; DA15D.15@-71.95,47.425 -71.275,47.425 -70.4,48.3 -69.317,48.3 -69.247,48.37 -69.212,48.37 -69.081,48.5 v1(-69,48.5)
  Layer 1 w0.2: v1(-77.7,46.7) -70.384,46.7 -69.034,48.05 -69.034,48.466 v1(-69,48.5)
IO1A: D4A.1 IC8A.J9 J2A.3 | length 128.1
  Top Layer w0.145: IC8A.J9@28.019,39.586 v2(28.519,39.086)
  Mid-Layer 2 w0.2: v2(28.519,39.086) 29.013,39.58 51.554,39.58 54.255,42.281 v1(73.917,42.281)
  Mid-Layer 3 w0.2: v1(73.917,42.281) 77.698,38.499 77.698,27.793 76.724,26.819 76.724,-1.895 78.135,-3.305 v1(78.135,-6.439)
  Bottom Layer w0.2: v1(78.135,-6.439) 78.639,-6.943 78.639,-9.283 76.419,-11.503 76.419,-24.639 77.394,-25.614 79.411,-25.614 80.241,-26.444 D4A.1@80.241,-26.719 80.241,-26.994 79.518,-27.716 J2A.3@79.518,-31.667
IO1B: D4B.1 IC8B.J9 J2B.3 | length 75.7
  Top Layer w0.145: IC8B.J9@28.019,3.686 v2(28.519,3.186)
  Bottom Layer w0.2: v2(28.519,3.186) 28.519,2.495 29.285,1.729 29.542,1.729 30.307,0.964 30.307,-1.317 30.091,-1.533 30.091,-6.314 ; 30.091,-6.537 30.091,-6.314 ; J2B.3@67.178,-31.667 67.178,-27.813 68.069,-26.922 68.069,-26.614 D4B.1@68.169,-26.514 68.169,-25.057 67.926,-24.814 67.319,-24.814 61.619,-30.514 59.519,-30.514 58.569,-29.564 58.569,-18.264 58.619,-18.214 56.547,-16.142 55.019,-16.142 52.119,-13.242 37.019,-13.242 30.091,-6.314
IO2A: D4A.3 IC8A.K9 J2A.2 | length 133
  Top Layer w0.145: IC8A.K9@28.019,40.586 v2(28.519,40.086)
  Mid-Layer 2 w0.2: v2(28.519,40.086) 29.119,40.686 51.786,40.686 54,42.9 54.706,42.9 55.385,43.579 55.976,43.579 56.169,43.386 61.519,43.386 62.025,42.88 72.299,42.88 73.195,43.776 73.195,44.3 v1(73.22,44.326)
  Mid-Layer 3 w0.2: v1(73.22,44.326) 78.998,38.549 78.998,27.887 77.655,26.544 77.655,14.85 78.797,13.708 78.797,-2.206 80.312,-3.721 v1(80.312,-6.439)
  Bottom Layer w0.2: v1(80.312,-6.439) 80.312,-7.257 80.747,-7.692 80.747,-13.896 78.977,-15.666 78.977,-18.425 77.619,-19.782 77.619,-24.392 78.241,-25.014 81.019,-25.014 81.541,-25.536 D4A.3@81.541,-26.719 81.541,-26.994 82.058,-27.511 J2A.2@82.058,-31.667
IO2B: D4B.3 IC8B.K9 J2B.2 | length 77.1
  Top Layer w0.145: IC8B.K9@28.019,4.686 v2(28.519,4.186)
  Bottom Layer w0.2: v2(28.519,4.186) 28.955,3.75 28.955,3.184 29.353,2.786 29.606,2.786 31.019,1.373 31.019,-6.301 37.019,-12.301 52.119,-12.301 55.032,-15.214 56.931,-15.214 59.746,-18.029 59.746,-29.241 60.119,-29.614 61.453,-29.614 67.044,-24.024 68.529,-24.024 69.469,-24.964 D4B.3@69.469,-26.514 69.569,-26.614 69.569,-26.946 70.375,-27.753 70.375,-29.264 69.718,-29.921 J2B.2@69.718,-31.667
LA0_0_1: IC8A.C11 X5.37 | length 108.2
  Top Layer w0.1: IC8A.C11@26.019,33.586 25.419,32.986 25.419,29.56 26.29,28.689 65.763,28.689 71.141,34.067 71.244,34.067 76.37,39.193 83.477,39.193 84.484,38.186 104.813,38.186 105.036,38.409 105.036,40.018 104.778,40.276 92.791,40.276 91.719,41.348 91.719,43.256 X5.37@90.529,44.446
LA0_0_2: IC8B.C11 X9.37 | length 111
  Top Layer w0.1: IC8B.C11@26.019,-2.314 25.419,-2.914 25.419,-4.73 23.819,-6.33 23.819,-6.814 23.819,-7.302 23.647,-7.474 23.484,-7.474 23.311,-7.646 23.311,-8.164 23.484,-8.336 24.155,-8.336 24.327,-8.508 24.327,-9.026 24.155,-9.198 23.484,-9.198 23.311,-9.37 23.311,-9.888 23.484,-10.06 24.155,-10.06 24.327,-10.232 24.327,-10.75 24.155,-10.922 23.484,-10.922 23.311,-11.094 23.311,-11.612 23.484,-11.784 23.647,-11.784 23.819,-11.956 23.819,-12.006 23.819,-12.914 27.019,-16.114 42.617,-16.114 43.068,-16.114 43.518,-16.114 43.691,-16.287 43.691,-16.45 43.863,-16.622 44.38,-16.622 44.553,-16.45 44.553,-15.779 44.725,-15.606 45.242,-15.606 45.415,-15.779 45.415,-16.45 45.587,-16.622 46.104,-16.622 46.277,-16.45 46.277,-15.779 46.449,-15.606 46.966,-15.606 47.139,-15.779 47.139,-16.45 47.311,-16.622 47.828,-16.622 48.001,-16.45 48.001,-15.779 48.173,-15.606 48.69,-15.606 48.863,-15.779 48.863,-16.45 49.035,-16.622 49.552,-16.622 49.725,-16.45 49.725,-15.779 49.897,-15.606 50.414,-15.606 50.587,-15.779 50.587,-16.45 50.759,-16.622 51.276,-16.622 51.449,-16.45 51.449,-15.779 51.621,-15.606 52.138,-15.606 52.311,-15.779 52.311,-16.45 52.483,-16.622 53,-16.622 53.173,-16.45 53.173,-15.779 53.345,-15.606 53.862,-15.606 54.035,-15.779 54.035,-16.45 54.207,-16.622 54.724,-16.622 54.897,-16.45 54.897,-16.287 55.069,-16.114 55.119,-16.114 55.919,-16.114 61.318,-10.716 61.318,-7.755 62.926,-6.146 73.343,-6.146 77.075,-2.414 82.619,-2.414 89.219,4.186 89.219,10.906 X9.37@90.399,12.086
LA0_1_1: IC8A.B11 X5.35 | length 108.4
  Top Layer w0.1: IC8A.B11@26.019,32.586 25.619,32.186 25.619,30.271 26.845,29.046 65.574,29.046 77.397,40.869 80.549,40.869 81.024,41.343 81.291,41.611 81.291,41.794 79.678,43.407 79.678,43.59 80.105,44.017 80.288,44.017 83.494,40.81 83.677,40.81 84.104,41.237 84.104,41.42 80.897,44.626 80.897,44.809 81.324,45.236 81.507,45.236 84.916,41.827 85.099,41.827 85.526,42.253 85.526,42.436 82.116,45.845 82.116,46.028 82.543,46.455 82.726,46.455 86.135,43.046 86.318,43.046 86.745,43.472 86.745,43.655 85.131,45.268 85.131,45.451 85.167,45.487 86.349,46.669 92.452,46.669 93.069,46.052 X5.35@93.069,44.446
LA0_1_2: IC8B.B11 X9.35 | length 112.4
  Top Layer w0.1: IC8B.B11@26.019,-3.314 25.619,-3.714 25.619,-10.914 28.919,-14.214 56.794,-14.214 60.219,-10.789 60.219,-8.284 62.686,-5.817 72.713,-5.817 77.816,-0.714 80.602,-0.714 80.79,-0.526 80.955,-0.361 80.955,-0.117 80.66,0.178 80.66,0.422 81.026,0.787 81.27,0.787 82.779,-0.722 83.023,-0.722 83.389,-0.356 83.389,-0.113 81.879,1.397 81.879,1.641 82.245,2.007 82.489,2.007 83.998,0.497 84.242,0.497 84.608,0.863 84.608,1.106 83.098,2.616 83.098,2.86 83.464,3.226 83.708,3.226 85.217,1.716 85.461,1.716 85.827,2.082 85.827,2.325 84.317,3.835 84.317,4.079 84.683,4.445 84.927,4.445 86.436,2.935 86.68,2.935 87.046,3.301 87.046,3.545 86.075,4.515 86.075,4.759 86.11,4.795 86.319,5.003 86.319,12.686 87.019,13.386 91.639,13.386 X9.35@92.939,12.086
LA0_2_1: IC8A.D11 X5.33 | length 109.3
  Top Layer w0.145: IC8A.D11@26.007,34.574 v2(26.507,34.074)
  Bottom Layer w0.1: v2(26.507,34.074) 26.507,33.198 27.019,32.686 52.051,32.686 54.684,35.318 62.952,35.318 65.319,37.686 65.319,39.318 67.012,41.011 73.694,41.011 76.119,38.586 77.194,38.586 79.089,40.481 79.429,40.821 79.429,41.058 78.409,42.079 78.409,42.315 78.961,42.868 79.198,42.868 81.476,40.59 81.713,40.59 82.265,41.142 82.265,41.379 79.987,43.657 79.987,43.894 80.54,44.446 80.776,44.446 83.054,42.168 83.291,42.168 83.843,42.721 83.843,42.957 81.566,45.235 81.566,45.472 82.118,46.024 82.355,46.024 84.632,43.746 84.869,43.746 85.422,44.299 85.422,44.536 83.144,46.813 83.144,47.05 83.696,47.602 83.933,47.602 86.211,45.325 86.447,45.325 87,45.877 87,46.114 85.979,47.134 85.979,47.371 86.015,47.406 86.334,47.726 94.306,47.726 95.609,46.422 X5.33@95.609,44.446
LA0_2_2: IC8B.D11 X9.33 | length 112.7
  Top Layer w0.1: IC8B.D11@26.019,-1.314 26.419,-1.714 26.419,-8.314 26.61,-8.505 26.646,-8.541 26.89,-8.541 27.101,-8.33 27.345,-8.33 27.71,-8.695 27.71,-8.939 26.293,-10.356 26.293,-10.6 26.659,-10.966 26.903,-10.966 28.32,-9.549 28.564,-9.549 28.929,-9.914 28.929,-10.158 27.512,-11.575 27.512,-11.819 27.878,-12.185 28.122,-12.185 29.539,-10.768 29.783,-10.768 30.148,-11.133 30.148,-11.377 29.937,-11.588 29.937,-11.832 30.21,-12.105 30.319,-12.214 46.072,-12.214 46.122,-12.214 46.208,-12.128 46.294,-12.042 46.294,-11.625 46.466,-11.452 46.984,-11.452 47.156,-11.625 47.156,-12.804 47.328,-12.976 47.846,-12.976 48.018,-12.804 48.018,-11.625 48.19,-11.452 48.708,-11.452 48.88,-11.625 48.88,-12.804 49.052,-12.976 49.57,-12.976 49.742,-12.804 49.742,-11.625 49.914,-11.452 50.432,-11.452 50.604,-11.625 50.604,-12.804 50.776,-12.976 51.294,-12.976 51.466,-12.804 51.466,-11.625 51.638,-11.452 52.156,-11.452 52.328,-11.625 52.328,-12.042 52.5,-12.214 53.299,-12.214 57.119,-12.214 59.67,-9.664 59.67,-8.013 62.194,-5.488 72.101,-5.488 77.562,-0.027 79.206,-0.027 85.519,6.286 85.519,12.586 87.019,14.086 93.479,14.086 X9.33@95.479,12.086
LA0_3_1: IC8A.B10 X5.31 | length 112.1
  Top Layer w0.1: IC8A.B10@27.019,32.586 27.019,32.116 26.619,31.716 26.619,30.238 27.394,29.464 65.221,29.464 78.563,42.806 78.563,44.593 83.303,49.332 84.331,49.332 84.97,49.332 85.1,49.203 85.1,48.605 85.229,48.476 85.832,48.476 85.962,48.605 85.962,50.219 86.091,50.348 86.694,50.348 86.824,50.219 86.824,48.446 86.953,48.316 87.556,48.316 87.686,48.446 87.686,50.219 87.815,50.348 88.418,50.348 88.548,50.219 88.548,48.446 88.677,48.316 89.28,48.316 89.41,48.446 89.41,50.219 89.539,50.348 90.142,50.348 90.272,50.219 90.272,48.446 90.401,48.316 91.004,48.316 91.134,48.446 91.134,50.219 91.263,50.348 91.866,50.348 91.996,50.219 91.996,48.446 92.125,48.316 92.728,48.316 92.858,48.446 92.858,50.219 92.987,50.348 93.59,50.348 93.72,50.219 93.72,48.446 93.849,48.316 94.452,48.316 94.582,48.446 94.582,50.219 94.711,50.348 95.314,50.348 95.444,50.219 95.444,48.446 95.573,48.316 96.176,48.316 96.306,48.446 96.306,49.203 96.435,49.332 96.485,49.332 97.41,49.332 98.149,48.593 X5.31@98.149,44.446
LA0_3_2: IC8B.B10 X9.31 | length 111.4
  Top Layer w0.1: IC8B.B10@27.019,-3.314 27.019,-3.784 26.619,-4.184 26.619,-5.843 27.591,-6.814 27.591,-7.895 28.95,-9.254 29.351,-9.254 30.168,-9.254 30.341,-9.082 30.341,-8.157 30.513,-7.984 31.03,-7.984 31.203,-8.157 31.203,-10.352 31.375,-10.524 31.892,-10.524 32.065,-10.352 32.065,-8.157 32.237,-7.984 32.754,-7.984 32.927,-8.157 32.927,-10.352 33.099,-10.524 33.616,-10.524 33.789,-10.352 33.789,-8.157 33.961,-7.984 34.478,-7.984 34.651,-8.157 34.651,-10.352 34.823,-10.524 35.34,-10.524 35.513,-10.352 35.513,-8.157 35.685,-7.984 36.202,-7.984 36.375,-8.157 36.375,-10.352 36.547,-10.524 37.019,-10.524 37.2,-10.343 37.2,-8.3 37.921,-7.579 59.559,-7.579 61.979,-5.159 71.595,-5.159 77.426,0.672 79.005,0.672 84.609,6.276 84.609,12.471 86.895,14.757 97.698,14.757 98.019,14.436 X9.31@98.019,12.086
LA0_4_1: IC8A.A10 X5.29 | length 109.2
  Top Layer w0.1: IC8A.A10@27.019,31.586 27.019,30.49 27.734,29.776 64.895,29.776 78.113,42.993 78.113,45.103 84.214,51.204 99.991,51.204 100.689,50.506 100.689,50.086 100.689,49.474 100.818,49.344 103.656,49.344 103.785,49.215 103.785,48.612 103.656,48.482 99.305,48.482 99.176,48.353 99.176,47.75 99.305,47.62 103.656,47.62 103.785,47.491 103.785,46.888 103.656,46.758 99.305,46.758 99.176,46.629 99.176,46.026 99.305,45.896 100.56,45.896 100.689,45.767 100.689,45.717 X5.29@100.689,44.446
LA0_4_2: IC8B.A10 X9.29 | length 108.9
  Top Layer w0.1: IC8B.A10@27.019,-4.314 27.019,-5.677 28.328,-6.986 59.412,-6.986 61.586,-4.812 71.197,-4.812 77.225,1.216 78.15,1.216 83.192,6.258 83.192,11.853 87.289,15.951 87.816,15.951 88.014,15.951 88.187,15.778 88.187,15.361 88.359,15.189 88.876,15.189 89.049,15.361 89.049,16.54 89.221,16.713 89.738,16.713 89.911,16.54 89.911,15.361 90.083,15.189 90.6,15.189 90.773,15.361 90.773,16.54 90.945,16.713 91.462,16.713 91.635,16.54 91.635,15.361 91.807,15.189 92.324,15.189 92.497,15.361 92.497,16.54 92.669,16.713 93.186,16.713 93.359,16.54 93.359,15.361 93.531,15.189 94.048,15.189 94.221,15.361 94.221,16.54 94.393,16.713 94.91,16.713 95.083,16.54 95.083,15.361 95.255,15.189 95.772,15.189 95.945,15.361 95.945,16.54 96.117,16.713 96.634,16.713 96.807,16.54 96.807,15.361 96.979,15.189 97.496,15.189 97.669,15.361 97.669,16.54 97.841,16.713 98.358,16.713 98.531,16.54 98.531,15.361 98.703,15.189 99.22,15.189 99.393,15.361 99.393,15.778 99.565,15.951 99.615,15.951 100.295,15.951 100.559,15.687 X9.29@100.559,12.086
LA0_5_1: IC8A.D10 X5.27 | length 111.1
  Top Layer w0.145: IC8A.D10@26.985,34.597 v2(27.485,34.097)
  Mid-Layer 2 w0.1: v2(27.485,34.097) 27.861,34.473 34.832,34.473 35.199,34.106 52.781,34.106 53.671,34.996 64.929,34.996 65.319,35.386 70.298,35.386 70.357,35.326 75.657,35.326 77.116,36.786 79.083,36.786 81.304,39.006 84.098,39.006 84.148,39.006 84.316,39.174 84.316,40.109 84.483,40.276 85.264,40.276 85.432,40.109 85.432,37.904 85.599,37.736 86.38,37.736 86.548,37.904 86.548,40.109 86.715,40.276 87.496,40.276 87.664,40.109 87.664,37.904 87.831,37.736 88.612,37.736 88.78,37.904 88.78,40.109 88.947,40.276 89.728,40.276 89.896,40.109 89.896,37.904 90.063,37.736 90.844,37.736 91.012,37.904 91.012,40.109 91.179,40.276 91.96,40.276 92.128,40.109 92.128,37.904 92.295,37.736 93.076,37.736 93.244,37.904 93.244,40.109 93.411,40.276 94.192,40.276 94.36,40.109 94.36,37.904 94.527,37.736 95.308,37.736 95.476,37.904 95.476,40.109 95.643,40.276 96.424,40.276 96.592,40.109 96.592,37.904 96.759,37.736 97.54,37.736 97.708,37.904 97.708,38.839 97.875,39.006 98.381,39.006 101.282,39.006 102.019,39.743 102.019,43.236 X5.27@103.229,44.446
LA0_5_2: IC8B.D10 X9.27 | length 109.3
  Top Layer w0.1: IC8B.D10@27.019,-1.314 27.019,-1.784 27.467,-2.232 27.467,-2.293 27.708,-2.533 27.708,-3.047 27.421,-3.335 27.421,-3.63 27.419,-3.631 27.419,-5.511 28.434,-6.526 59.405,-6.526 61.466,-4.465 70.525,-4.465 80.405,5.416 80.405,9.653 88.62,17.868 88.831,17.868 89.305,17.868 89.478,17.695 89.478,17.278 89.65,17.106 90.167,17.106 90.34,17.278 90.34,18.233 90.512,18.406 91.029,18.406 91.202,18.233 91.202,17.278 91.374,17.106 91.891,17.106 92.064,17.278 92.064,18.233 92.236,18.406 92.753,18.406 92.926,18.233 92.926,17.278 93.098,17.106 93.615,17.106 93.788,17.278 93.788,18.233 93.96,18.406 94.477,18.406 94.65,18.233 94.65,17.278 94.822,17.106 95.339,17.106 95.512,17.278 95.512,18.233 95.684,18.406 96.201,18.406 96.374,18.233 96.374,17.278 96.546,17.106 97.063,17.106 97.236,17.278 97.236,18.233 97.408,18.406 97.925,18.406 98.098,18.233 98.098,17.278 98.27,17.106 98.787,17.106 98.96,17.278 98.96,17.695 99.132,17.868 99.182,17.868 99.837,17.868 103.099,14.606 X9.27@103.099,12.086
LA0_6_1: IC8A.B9 X5.25 | length 108.5
  Top Layer w0.1: IC8A.B9@28.019,32.586 28.019,32.142 27.619,31.742 27.619,30.472 27.936,30.155 64.645,30.155 70.715,36.225 70.715,38.282 72.219,39.786 73.989,39.786 77.549,43.346 77.549,45.427 84.103,51.982 105.41,51.982 105.769,51.623 105.769,51.112 105.769,50.625 105.937,50.457 106.872,50.457 107.039,50.29 107.039,49.509 106.872,49.341 104.667,49.341 104.499,49.174 104.499,48.393 104.667,48.225 106.872,48.225 107.039,48.058 107.039,47.277 106.872,47.109 104.667,47.109 104.499,46.942 104.499,46.161 104.667,45.993 105.602,45.993 105.769,45.826 105.769,45.776 X5.25@105.769,44.446